# Altium PCB 8051_at89s52.PcbDoc
Units mil, origin at the board's own origin, x right, y up, seen from the top; angles counter-clockwise.
Board outline 4615.03 x 2945.03 mil, 2 copper layers (Top Layer, Bottom Layer); 43 components, 47 nets, 185 pads, 22 vias.
Unrouted connection lines stored in the file: 13.
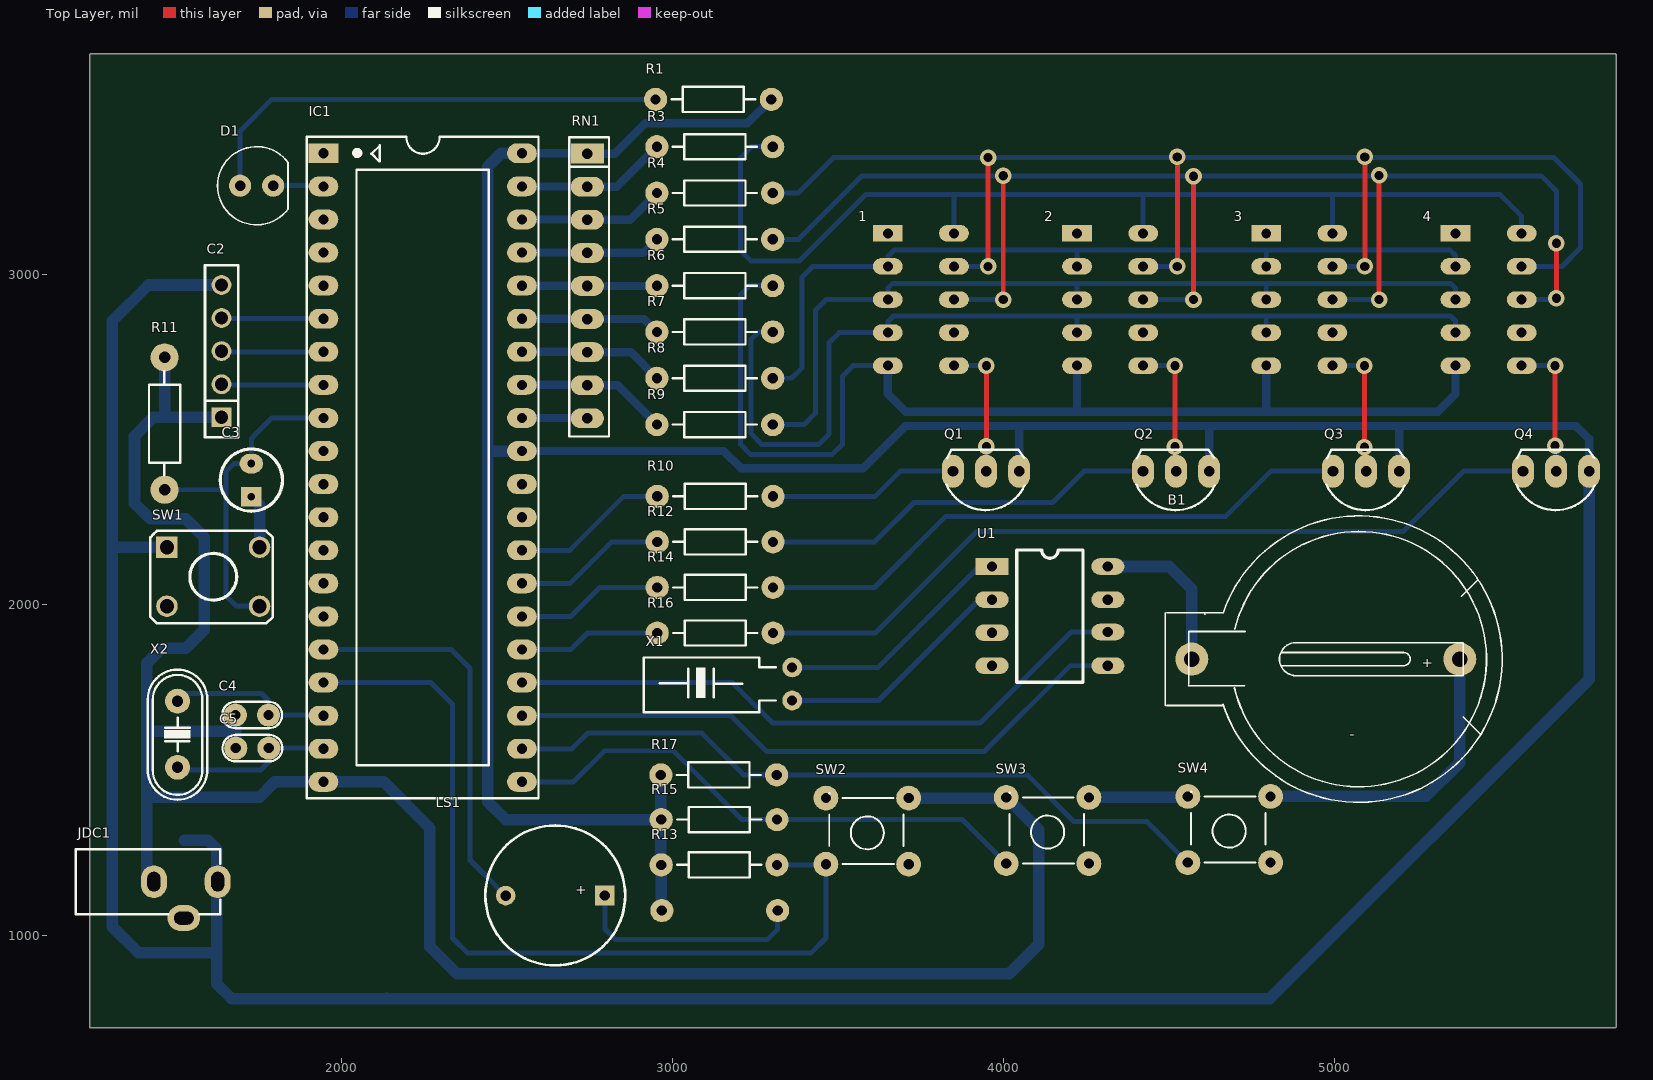
[diagram p0: Top Layer view]
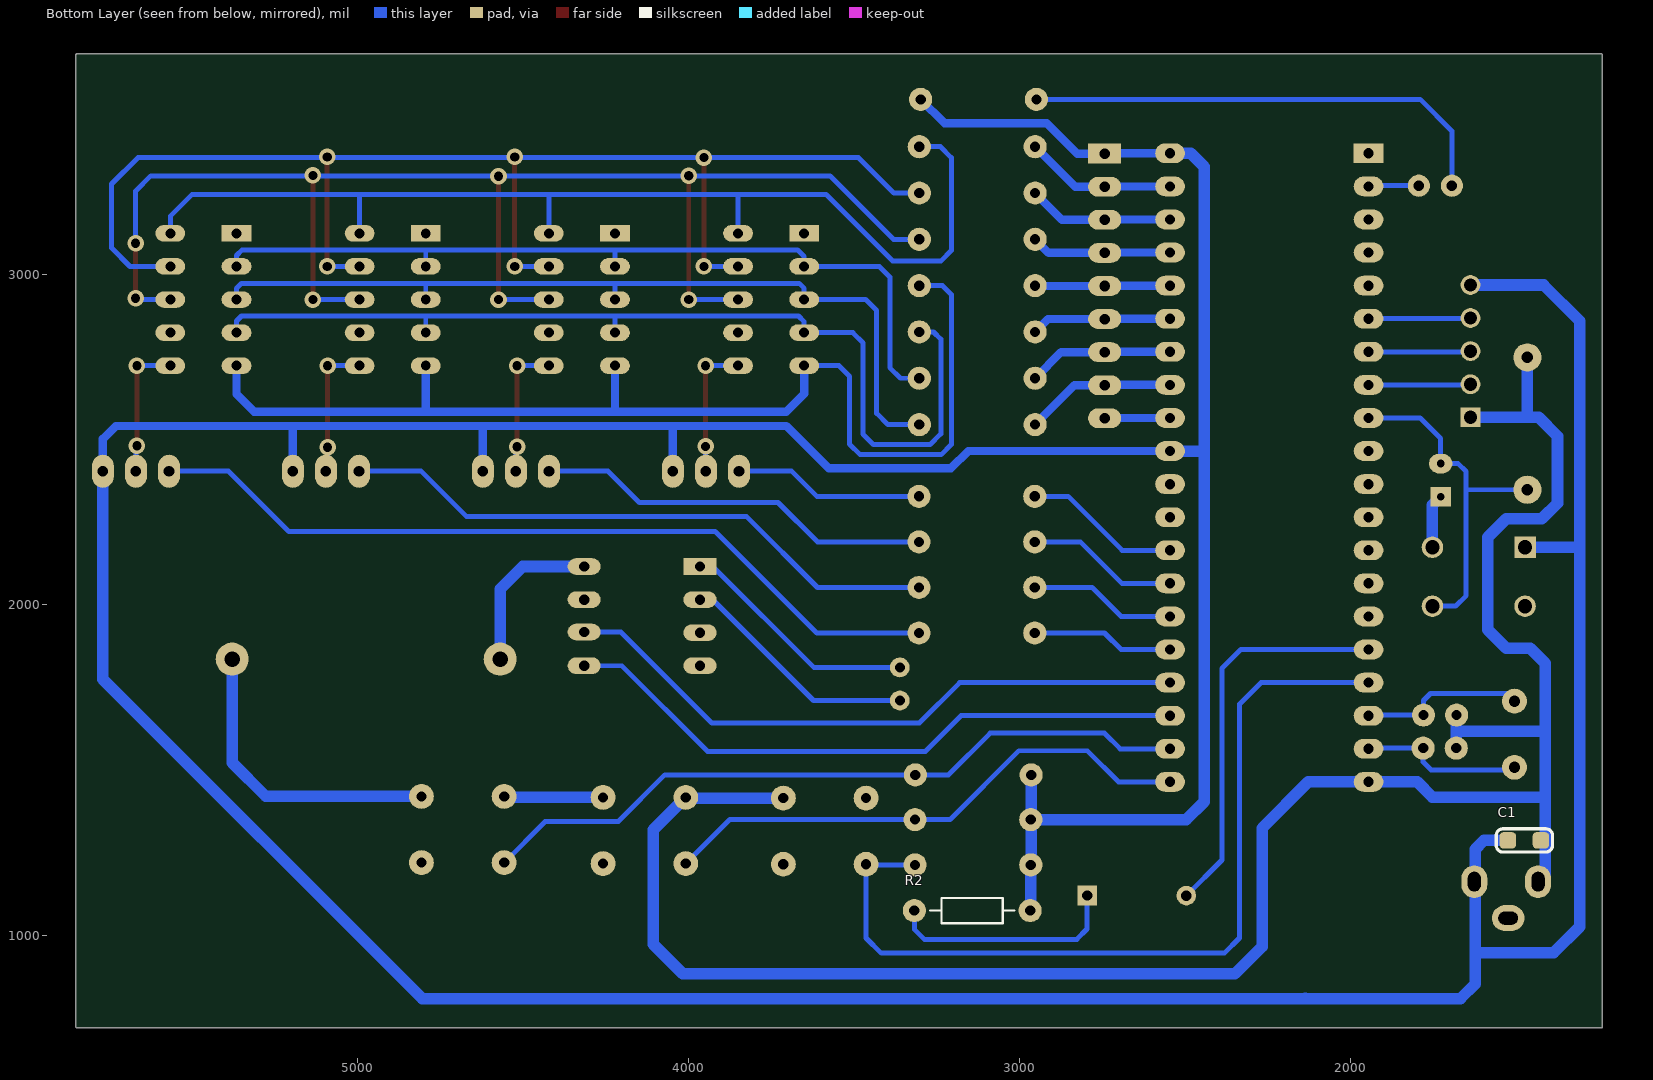
[diagram p1: Bottom Layer view, seen from below]
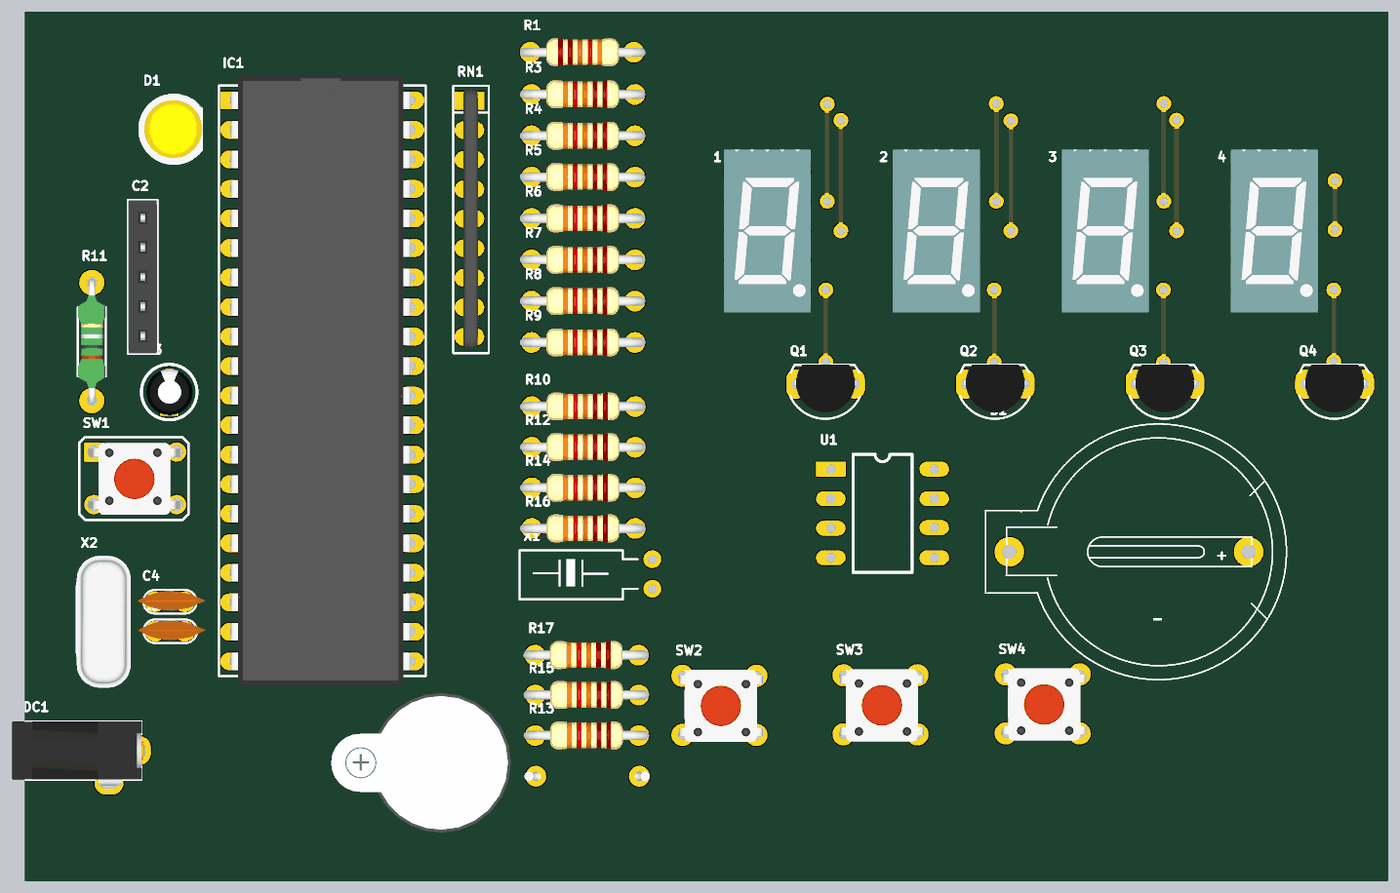
[diagram p2: 3D render of the assembled board from above, using the file's embedded part models]

## Layer stack, top to bottom
Top Solder: solder mask 0.4, Solder Resist, Dk 3.5
Top Layer: signal copper 1.4
Dielectric 1: dielectric 12.6, FR-4, Dk 4.8
Bottom Layer: signal copper 1.4
Bottom Solder: solder mask 0.4, Solder Resist, Dk 3.5

## Board outline
1236.98,726 ccw(c1242,726) 1242,720.99 5847,720.99 ccw(c5847,726) 5852.02,726 5852.02,3661 ccw(c5847,3661) 5847,3666.01 1242,3666.01 ccw(c1242,3661) 1236.98,3661

## Design rules (kind name [scope] priority, off if disabled: settings)
Clearance [All] p1: gap=10 ignorepadtopadclearanceinfootprint=FALSE except(0: Arc-Hole Track-Hole SMDPad-Hole THPad-Hole Via-Hole Fill-Hole Poly-Hole Region-Hole Text-Hole)
PolygonConnect [All] p1: connectstyle=Relief reliefconductorwidth=10 reliefentries=4 polygonreliefangle="90 Angle" airgapwidth=10
RoutingVias [All] p1: holewidth=28 width=50 viastyle="Through Hole" minholewidth=28 minwidth=50 maxholewidth=28 maxwidth=50
SolderMaskExpansion [All] p1: expansion=4
Width [All] p1: maxlimit=35 minlimit=15 preferedwidth=25
30 further rules are at their usual default settings.

## Components (designator, comment, footprint, x,y, rotation, side; value= is the part's Value field where it differs from the comment)
1 "7seg" SM410361N 3720,2883 r0 top
2 "7seg" SM410361N 4292,2883 r0 top
3 "7seg" SM410361N 4864,2883 r0 top
4 "7seg" SM410361N 5436,2883 r0 top
B1 "BATT-Holder" BATT-LI-Bott-22mm 4569,1836 r0 top value=3.3V
C1 "104" CAP_0805 1473,1288 r0 bottom
C2 "JP5" JP5-C1T 1636,2567 r90 top
C3 "10uF" CA-ALU-2.54 1726,2377 r90 top value=104
C4 "33pF" CN1 1678,1667 r0 top value=100pF
C5 "33pF" CN1 1679,1567 r0 top value=100pF
D1 "LED" "LED-0 5mm YELLOW" 1742,3267 r90 top
IC1 "AT89S52" DIP40/W0.6 1944,3365 r270 top
JDC1 "Jac DC" DC3 1624.36,1163.24 r0 top
LS1 "SPEAKER" speaker 2795,1121.5 r180 top
Q1 "A1015" QTO-92 3947,2404 r180 top
Q2 "A1015" QTO-92 4521.33,2404 r180 top
Q3 "A1015" QTO-92 5095.67,2404 r180 top
Q4 "A1015" QTO-92 5670,2404 r180 top
R1 "1k" R1/4W 3298,3528 r180 top value="R1/4W - 1K"
R2 "1k" R1/4W 2967,1076 r0 bottom value="R1/4W - 1K"
R3 "1k" R1/4W 2952,3385 r0 top value="R1/4W - 1K"
R4 "1k" R1/4W 2952,3245 r0 top value="R1/4W - 1K"
R5 "1k" R1/4W 2952,3105 r0 top value="R1/4W - 1K"
R6 "1k" R1/4W 2952,2965 r0 top value="R1/4W - 1K"
R7 "1k" R1/4W 2952,2825 r0 top value="R1/4W - 1K"
R8 "1k" R1/4W 2952,2685 r0 top value="R1/4W - 1K"
R9 "1k" R1/4W 2952,2545 r0 top value="R1/4W - 1K"
R10 "1k" R1/4W 2953,2328 r0 top value="R1/4W - 1K"
R11 "10k" RES-1/4W 1459,2533 r270 top value="R1/4W - 1K"
R12 "1k" R1/4W 2953,2190.33 r0 top value="R1/4W - 1K"
R13 "10k" R1/4W 2965,1214 r0 top value="R1/4W - 1K"
R14 "1k" R1/4W 2953,2052.67 r0 top value="R1/4W - 1K"
R15 "10k" R1/4W 2965,1351 r0 top value="R1/4W - 1K"
R16 "1k" R1/4W 2953,1915 r0 top value="R1/4W - 1K"
R17 "10k" R1/4W 2964,1486 r0 top value="R1/4W - 1K"
RN1 "10K" RN8 2742,3364 r270 top value="Tro thanh 10K"
SW1 "SW" "BUTTON 4 PIN" 1611,2085 r0 top value="Button chip 4 pin"
SW2 "SW" SW4 3713,1216 r180 top value="Button chip 4 pin"
SW3 "SW" SW4 4258,1218 r180 top value="Button chip 4 pin"
SW4 "SW" SW4 4807,1221 r180 top value="Button chip 4 pin"
U1 "Realtime Clock IC" DS1307.Dip8 3965,2116.03 r0 top
X1 "32,768 Khz" XT32k 3361,1711 r180 top value=32,768khz
X2 "12MHz" XT2 1503,1609 r90 top value=4Mhz

## Footprints (in the part's own frame and the unit in brackets; to place one, negate y for a bottom-side part, rotate by r counter-clockwise, add the part's x,y. Pads: shape width x height; smd on the part's side, far side on the other; paste and mask are expansions set on the pad)
BATT-LI-Bott-22mm [mil]
  round 100 hole 47.24 unplated: 1(0,0) 2(810,0)
  silkscreen extent -80,-433 938,433, body extent -81,-435 938,433, height 283
"BUTTON 4 PIN" [mil] "BUTTON SMORE 280mil x 178mil"
  rect 65x65 hole 43.31: 1(-140,89)
  round 65 hole 43.31: 1(140,89) 2(-140,-89) 2(140,-89)
  silkscreen extent -190,-141 180,139, body extent -159,-124 153,120, height 276
CA-ALU-2.54 [mm]
  rect 1.5x1.58 hole 0.6: 1(-1.27,0)
  oval 1.5x1.8 hole 0.6: 2(1.27,0)
  silkscreen extent -2.39,-2.39 2.39,2.39, body extent -2,-2.03 2.01,1.97, height 7.01
CAP_0805 [mil]
  rrect50% 50x50 smd: 1(-50,0) 2(50,0)
  silkscreen extent -85,-35 85,35, body extent -40,-25 40,25, height 24
CN1 [mil]
  round 70 hole 31: 1(0,0) 2(100,0)
  silkscreen extent -40,-40 141,40, body extent -60,-30 170,37, height 265
DC3 [mm] "WR-DC_DC Power Jack_Right Angled_THT Center Pin ?1.0_Plug ID ?1.05_Plug OD ?3.5"
  oval 2x2.5 hole 1 slot 1.5 at 90 deg: 1(0,0) 2(-4.9,0)
  oval 2.5x2 hole 1 slot 1.5 at 0 deg: 3(-2.6,-2.8)
  silkscreen extent -10.9,-2.5 0.2,2.5, body extent -10.9,-3 0.4,2.5, height 7.81
DIP40/W0.6 [mil] "40 PIN, W 600mil, Pin to pin 100mil"
  rect 60x90 hole 31: 1(0,0)
  oval 60x90 hole 31: 2(100,0) 3(200,0) 4(300,0) 5(400,0) 6(500,0) 7(600,0) 8(700,0) 9(800,0) 10(900,0) 11(1000,0) 12(1100,0) 13(1200,0) 14(1300,0) 15(1400,0) 16(1500,0) 17(1600,0) 18(1700,0) 19(1800,0) 20(1900,0) 21(1900,600) 22(1800,600) 23(1700,600) 24(1600,600) 25(1500,600) 26(1400,600) 27(1300,600) 28(1200,600) 29(1100,600) 30(1000,600) 31(900,600) 32(800,600) 33(700,600) 34(600,600) 35(500,600) 36(400,600) 37(300,600) 38(200,600) 39(100,600) 40(0,600)
  silkscreen extent -50,-50 1950,650, body extent -82,-10 1982,600, height 224
DS1307.Dip8 [mm] "Dual Inline Package 8 pins"
  rect 2.54x1.27 hole 0.8: 1(0,0)
  oval 2.54x1.27 hole 0.8: 2(0,-2.54) 3(0,-5.08) 4(0,-7.62) 5(8.89,-7.62) 6(8.89,-5.03) 7(8.89,-2.54) 8(8.89,0)
  silkscreen extent 1.91,-8.89 6.98,1.27, body extent 0.03,-8.89 8.77,1.27, height 5.4
JP5-C1T [mm] "5 row, straight, gold plating"
  rect 1.52x1.52 hole 1.02: 1(0,0)
  round 1.52 hole 1.02: 2(2.54,0) 3(5.08,0) 4(7.62,0) 5(10.16,0)
  silkscreen extent -1.52,-1.27 11.68,1.27, body extent -1.52,-1.25 11.68,1.25, height 8.51
"LED-0 5mm YELLOW" [mil] "Typical LED; YELLOW; 2 Leads; Solder Pad 35mil"
  round 67 hole 32: 1(0,50) 2(0,-50)
  silkscreen extent -118,-96 118,118, body extent -118,-96 119,117, height 345
QTO-92 [mil] "TO-92"
  oval 66x100 hole 32: 1(-100,0) 2(0,0) 3(100,0)
  silkscreen extent -117,-65 120,118, body extent -109,-66 109,96, height 245
R1/4W [mil] "R 1/4W, 2 Pin, 350mil"
  round 70 hole 31: 1(0,0) 2(350,0)
  silkscreen extent 48,-38 302,38, body extent -40,-47 386,47, height 111
RES-1/4W [mil]
  round 85 hole 35: 1(-215,5) 2(185,5)
  silkscreen extent -173,-42 141,52, body extent -227,-42 197,52, height 95
RN8 [mil] "R SIP8, 9 Pin"
  rect 60x100 hole 32: 1(0,0)
  oval 60x100 hole 32: 2(100,0) 3(200,0) 4(300,0) 5(400,0) 6(500,0) 7(600,0) 8(700,0) 9(800,0)
  silkscreen extent -50,-55 855,65, body extent -43,-20 843,29, height 219
SM410361N [mil] "7seg-0,36''"
  rect 90x50 hole 30: 1(-70,240)
  oval 90x50 hole 30: 2(-70,140) 3(-70,40) 4(-70,-60) 5(-70,-160) 6(130,-160) 7(130,-60) 8(130,40) 9(130,140) 10(130,240)
  body extent -118,-236 178,316, height 336
speaker [mm]
  rect 1.5x1.5 hole 0.8: 1(0,0)
  round 1.5 hole 0.8: 2(7.62,0.013)
  silkscreen extent -1.55,-5.38 9.18,5.36, body extent -2.22,-6 13.24,6, height 4.5
SW4 [mil] "SW button 4pin, 250 x250 mil"
  round 75 hole 31: 1(0,0) 2(250,-200) 3(250,0) 4(0,-200)
  silkscreen extent 15,-215 240,0, body extent -36,-220 276,24, height 276
XT2 [mil] "Footpin for Crystal 2 pin"
  round 75 hole 34: 1(-100,0) 2(100,0)
  silkscreen extent -198,-90 195,90, body extent -233,-93 213,90, height 138
XT32k [mil] "Crystal 32k, 2 pin, real timer for DS1307"
  round 60 hole 30: 1(0,0) 2(0,-100)
  silkscreen extent 50,-130 449,36

## Part data
1 2 3 4: library part SM410361N, "7seg 0,36''"
B1: "Battery holder", Manufacturer=China, ComponentLink1Description="Digikey Part Link", ComponentLink2Description="Open Datasheet", ComponentLink2URL=H:\LIBRARY\LIBRARY.Datasheet\, Price="3000 VND", Published=13-April-2009, Publisher="Hoang Nguyen", Vendor=Digikey
C1: library part "Cap Semi", "Capacitor (Semiconductor SIM Model)", LatestRevisionDate=17-Jul-2002, LatestRevisionNote="Re-released for DXP Platform.", PackageReference=C1206, Publisher="Altium Limited"
C2: "WR-PHD 2.54 mm Angled Socket Header", Manufacturer="Würth Elektronik eiSos GmbH", partNo=613005143121, ComponentLink1 Description=Manufacturer, ComponentLink1URL=http://www.we-online.com, ComponentLink2 Description=Datasheet, ComponentLink2URL=http://katalog.we-online.de/em/datasheet/6130xx143121.pdf, Created by="Karrer Zheng", Created Date="29 March 2013", NoPins=05
C3: library part CN-ALU-DIP, "Capacitor (Semiconductor SIM Model)", LatestRevisionDate=17-Jul-2002, LatestRevisionNote="Re-released for DXP Platform.", PackageReference=C1206, Publisher="Altium Limited"
C4 C5: library part CN1, "Cap np  1pF - 472pF"
D1: "Typical LED", LatestRevisionDate=08-Jul-2005, LatestRevisionNote="Mech Layer 1 removed.", PackageReference=LED-1, Published=8-Jun-2000, Publisher="Altium Limited"
IC1: "AT89S52, 8k Byte Flash Memory , 40 Pin"
JDC1: library part DCIN, "Jac DC input"
Q1 Q2 Q3 Q4: library part A1015_1, "PNP 600mW, ECB", =A1013
R1 R2 R3 R4 R5 R6 R7 R8 R9 R10 R11 R12 R13 R14 R15 R16 R17: library part R1/4W, "Resistor 1/4W"
RN1: library part RN8, "Resistor 8 (Thanh)"
SW1 SW2 SW3 SW4: library part SW4, "Switch button 4 pin"
U1: library part DS1307, Manufacturer=Maxim, ComponentLink1Description="Digikey Part Link", ComponentLink2Description="Open Datasheet", ComponentLink2URL=H:\LIBRARY\LIBRARY.Datasheet\DS1307.pdf
X1: library part XT32k, "Crystal 32,768kHz for timer real"
X2: library part XT2, "Crystal For all Crystal 2pin."
LS1: ComponentLink1Description="Digikey Part Link", ComponentLink2Description="Open Datasheet", ComponentLink2URL=H:\LIBRARY\LIBRARY.Datasheet\, Published=13-April-2009, Publisher="Hoang Nguyen", Vendor=Digikey

## Via types
v1: diameter 50, hole 28, Top Layer to Bottom Layer, 22 vias

## Nets (pads, with @x,y where several pads share a name; then routed paths per layer and width w, separated by ;. In a path a pad name is that pad's centre, name@x,y a point inside that pad or via, vN(x,y) a via of type N, cw(c..) or ccw(c..) an arc to the next point about the centre after c; other vN are vias at no path point)
+5V: C1.2 C2.5 C3.1 IC1.31 IC1.40 JDC1.1 Q1.1 Q2.1 Q3.1 Q4.1 R1.1 R2.1 R13.1 R15.1 R17.1 RN1.1 SW1.1 | length 16347.2
  Bottom Layer w25: IC1.31 3154,2465 3206,2413 3576,2413 3704,2541 4047,2541 ; IC1.40 2741,3365 RN1.1 2825,3364 2917,3456 3226,3456 R1.1 ; Q1.1 4047,2541 ; Q2.1 4621.33,2537.33 4625,2541 ; Q3.1 5195.67,2540.67 5196,2541 ; Q4.1 5770,2502 5731,2541 5196,2541 ; 4047,2541 4625,2541 ; 4625,2541 5196,2541
  Bottom Layer w35: SW1.1@1471,2174 1306,2174 ; C1.2 1595,1288 1622,1261 1622,949 ; C2.5 1415,2967 1306,2858 1306,2174 ; C3.1 1751,2302 SW1.1@1751,2174 ; 2135.91,810.91 2135,810 ; IC1.31 2445,2465 2441,2469 ; IC1.40 2482,3365 2441,3324 2441,2469 ; R17.1 R15.1@2964,1351 ; R15.1 R15.1@2964,1351 ; R2.1 2965,1078 R13.1 2964,1215 R15.1@2964,1351 ; Q4.1 5770,1775 4805,810 2135,810 ; 1306,2174 1306,1027 1384,949 1622,949 ; 1622,949 1622,854 1666,810 2135,810 ; 2441,2469 2441,1405 2495,1351 R15.1@2964,1351
a: 1.10 2.10 3.10 4.10 R3.2 | length 3283.3
  Bottom Layer w15: R3.2 3238,3385 3205,3352 3205,3071 3236,3040 3383,3040 3584,3241 3851,3241 ; 1.10 3850,3240 3851,3241 ; 2.10 4422,3240 4421,3241 ; 3.10 4994,3240 4995,3241 ; 4.10 5566,3175 5500,3241 4995,3241 ; 3851,3241 4421,3241 ; 4421,3241 4995,3241
b: 1.9 2.9 3.9 4.9 R4.2 | length 4209.1
  Top Layer w15: v1(3953,3023) v1(3953,3352) ; v1(4525,3023) v1(4525,3354) ; v1(5092,3023) v1(5092,3354)
  Bottom Layer w15: R4.2 3379,3245 3486,3352 v1(3953,3352) v1@5092,3352 ; 1.9 v1(3953,3023) ; 2.9 v1(4525,3023) ; 3.9 v1(5092,3023) ; v1(5092,3354) v1@5093,3355 ; v1@5093,3352 5664,3352 5744,3272 5744,3079 5688,3023 4.9
BTN1: IC1.17 R13.2 SW2.1 SW2.3 | length 2662.9
  Bottom Layer w15: IC1.17 2269,1765 2334,1700 2334,993 2380,947 3417,947 3463,993 SW2.3 3461,1214 R13.2
BTN2: IC1.21 R15.2 SW3.1 SW3.3 | length 1644.2
  Bottom Layer w15: IC1.21 2700,1465 2794,1559 3001,1559 3209,1351 R15.2 3875,1351 SW3.3
BTN3: IC1.22 R17.2 SW4.1 SW4.3 | length 2194.4
  Bottom Layer w15: IC1.22 2695,1565 2742,1612 3088,1612 3214,1486 R17.2 4071,1486 4212,1345 4433,1345 SW4.3
buz: IC1.16 LS1.2 | length 1198.3
  Bottom Layer w15: IC1.16 2330,1865 2387,1808 2387,1229 LS1.2
c: 1.8 2.8 3.8 4.8 R5.2 | length 4464.9
  Top Layer w15: v1(3999,2923) v1(3999,3297) ; v1(4574,2923) v1(4574,3296) ; v1(5135,2923) v1(5135,3298) ; v1(5671,2927) v1(5671,3093)
  Bottom Layer w15: R5.2 3380,3105 3572,3297 v1(3999,3297) v1@4575,3297 ; 1.8 v1(3999,2923) ; 2.8 v1(4574,2923) ; v1(4574,3296) v1@4575,3297 ; 3.8 v1(5135,2923) ; v1@5135,3297 v1@4575,3297 ; v1(5135,3298) v1@5138,3301 ; v1@5138,3297 5625,3297 5671,3251 v1(5671,3093) ; 4.8 5667,2923 v1(5671,2927)
d: 1.5 2.5 3.5 4.5 R6.2 | length 3460.7
  Bottom Layer w15: R6.2 3232,2965 3205,2938 3205,2485 3236,2454 3481,2454 3513,2486 3513,2691 3545,2723 1.5
  Bottom Layer w25: 1.5 3650,2638 3704,2584 4224,2584 ; 2.5 4222,2586 4224,2584 ; 3.5 4794,2584 ; 4.5 5366,2637 5313,2584 4794,2584 ; 4224,2584 4794,2584
e: 1.4 2.4 3.4 4.4 R7.2 | length 2987.4
  Bottom Layer w15: R7.2 3259,2825 3237,2803 3237,2517 3269,2485 3441,2485 3472,2516 3472,2792 3503,2823 1.4 3650,2856 3667,2873 4218,2873 ; 2.4 4222,2869 4218,2873 ; 3.4 4794,2872 4795,2873 ; 4.4 5366,2858 5351,2873 4795,2873 ; 4218,2873 4795,2873
f: 1.2 2.2 3.2 4.2 R8.2 | length 2544.5
  Bottom Layer w15: R8.2 3359,2685 3391,2717 3391,2991 3423,3023 1.2 3650,3053 3670,3073 4221,3073 ; 2.2 4222,3072 4221,3073 ; 3.2 4794,3070 4791,3073 ; 4.2 5366,3056 5349,3073 4791,3073 ; 4221,3073 4791,3073
g: 1.3 2.3 3.3 4.3 R9.2 | length 2582.4
  Bottom Layer w15: R9.2 3397,2545 3431,2579 3431,2890 3464,2923 1.3 3650,2957 3665,2972 4220,2972 ; 2.3 4222,2970 4220,2972 ; 3.3 4794,2971 4795,2972 ; 4.3 5366,2957 5351,2972 4795,2972 ; 4220,2972 4795,2972
GND: B1.2 C1.1 C2.1 C4.1 C5.1 IC1.20 JDC1.2 JDC1.3 R11.1 SW2.2 SW2.4 SW3.2 SW3.4 SW4.2 SW4.4 | length 7668.6
  Bottom Layer w35: JDC1.2@1421.09,1161 1410,1172.09 1410,1419 ; R11.1 1464,2574 1471,2567 ; C2.1 1471,2567 ; 1678,1618 1412,1618 1410,1620 ; C4.1 1679,1666 C5.1 ; SW2.4 4006,1416 SW3.2 4106,1320 4106,974 4017,885 2348,885 2266,967 2266,1325 2126,1465 IC1.20 1797,1465 1751,1419 1410,1419 ; SW3.4 4554,1418 SW4.2 ; SW4.4 5277,1421 5379,1523 B1.2 ; 1410,1419 1410,1620 ; 1410,1620 1410,1824 1455,1869 1528,1869 1584,1925 1584,2204 1528,2260 1420,2260 1373,2307 1373,2510 1430,2567 1471,2567
LED: D1.2 IC1.2 | length 152.8
  Bottom Layer w15: D1.2 1942,3267 IC1.2
LED1: 1.1 1.6 Q1.2 | length 417.4
  Top Layer w15: v1(3948,2479) v1(3948,2723)
  Bottom Layer w15: 1.6 v1(3948,2723) ; Q1.2 3948,2405 v1(3948,2479)
LED1_MCU: IC1.28 R10.1 | length 476.5
  Bottom Layer w15: IC1.28 2689,2165 2852,2328 R10.1
LED2: 2.1 2.6 Q2.2 | length 416.4
  Top Layer w15: v1(4518,2478.33) v1(4518,2723)
  Bottom Layer w15: 2.6 v1(4518,2723) ; v1(4518,2478.33) 4521.33,2475 Q2.2
LED2_MCU: IC1.27 R12.1 | length 460.9
  Bottom Layer w15: IC1.27 2690,2065 2815.33,2190.33 R12.1
LED3: 3.1 3.6 Q3.2 | length 417.7
  Top Layer w15: v1(5090.67,2476.67) v1(5090.67,2723)
  Bottom Layer w15: 3.6 v1(5090.67,2723) ; v1(5090.67,2476.67) 5090.67,2409 Q3.2
LED3_MCU: IC1.26 R14.1 | length 445.3
  Bottom Layer w15: IC1.26 2692,1965 2779.67,2052.67 R14.1
LED4: 4.1 4.6 Q4.2 | length 421.2
  Top Layer w15: v1(5667,2481) v1(5667,2723)
  Bottom Layer w15: 4.6 v1(5667,2723) ; v1(5667,2481) 5670,2478 Q4.2
LED4_MCU: IC1.25 R16.1 | length 429.7
  Bottom Layer w15: IC1.25 2692,1865 2742,1915 R16.1
MISO: C2.3 IC1.7 | length 308.8
  Bottom Layer w15: C2.3 1638,2765 IC1.7
MOSI: C2.4 IC1.6 | length 308.8
  Bottom Layer w15: C2.4 1638,2865 IC1.6
NetB1_1: B1.1 U1.8 | length 494.2
  Bottom Layer w35: U1.8 4500.97,2116.03 4569,2048 B1.1
NetC3_2: C3.2 IC1.9 R11.2 SW1.2 | length 1081.9
  Bottom Layer w15: R11.2 1649,2348 ; SW1.2@1751,1996 1681,1996 1649,2028 1649,2348 ; IC1.9 1788,2565 1726,2503 C3.2 1673,2427 1649,2403 1649,2348
NetC4_2: C4.2 IC1.18 X2.2 | length 504.1
  Bottom Layer w15: X2.2 1526,1732 1757,1732 1778,1711 C4.2 1942,1667 IC1.18
NetC5_2: C5.2 IC1.19 X2.1 | length 497.1
  Bottom Layer w15: X2.1 1511,1501 1755,1501 1779,1525 C5.2 1942,1567 IC1.19
NetD1_1: D1.1 R1.2 | length 1460.8
  Bottom Layer w15: D1.1 1692,3432 1788,3528 R1.2
NetIC1_32: IC1.32 RN1.9 | length 198.4
  Bottom Layer w25: IC1.32 2741,2565 RN1.9
NetIC1_33: IC1.33 R9.1 RN1.8 | length 457.7
  Bottom Layer w25: IC1.33 2741,2665 RN1.8 2833,2664 R9.1
NetIC1_34: IC1.34 R8.1 RN1.7 | length 441.1
  Bottom Layer w25: IC1.34 2741,2765 RN1.7 2873,2764 R8.1
NetIC1_35: IC1.35 R7.1 RN1.6 | length 424.6
  Bottom Layer w25: IC1.35 2741,2865 RN1.6 2913,2864 R7.1
NetIC1_36: IC1.36 R6.1 RN1.5 | length 408.8
  Bottom Layer w25: IC1.36 2741,2965 RN1.5 2951,2964 R6.1
NetIC1_37: IC1.37 R5.1 RN1.4 | length 425.4
  Bottom Layer w25: IC1.37 2741,3065 RN1.4 2911,3064 R5.1
NetIC1_38: IC1.38 R4.1 RN1.3 | length 442
  Bottom Layer w25: IC1.38 2741,3165 RN1.3 2871,3164 R4.1
NetIC1_39: IC1.39 R3.1 RN1.2 | length 458.5
  Bottom Layer w25: IC1.39 2741,3265 RN1.2 2831,3264 R3.1
NetLS1_1: LS1.1 R2.2 | length 705.8
  Bottom Layer w15: LS1.1 2795,1020 2826,989 3287,989 3317,1019 R2.2
NetQ1_3: Q1.3 R10.2 | length 575.5
  Bottom Layer w15: R10.2 3612,2328 3688,2404 Q1.3
NetQ2_3: Q2.3 R12.2 | length 1206.8
  Bottom Layer w15: R12.2 3610,2190.33 3729.17,2309.5 4148.5,2309.5 4243,2404 Q2.3
NetQ3_3: Q3.3 R14.2 | length 1838.2
  Bottom Layer w15: R14.2 3610,2052.67 3823.83,2266.5 4670.5,2266.5 4808,2404 Q3.3
NetQ4_3: Q4.3 R16.2 | length 2469.6
  Bottom Layer w15: R16.2 3612,1915 3919,2222 5208,2222 5390,2404 Q4.3
NetU1_1: U1.1 X1.2 | length 730.3
  Bottom Layer w15: X1.2 3621,1811 3926.03,2116.03 U1.1
NetU1_2: U1.2 X1.1 | length 730.3
  Bottom Layer w15: X1.1 3622,1711 3927.03,2016.03 U1.2
SCK: C2.2 IC1.8 | length 308.8
  Bottom Layer w15: C2.2 1638,2665 IC1.8
SCL: IC1.24 U1.6 | length 1935.4
  Bottom Layer w15: IC1.24 3180,1765 3302,1643 3929,1643 4204,1918 U1.6
SDA: IC1.23 U1.5 | length 1923
  Bottom Layer w15: IC1.23 3176,1665 3284,1557 3941.97,1557 4201,1816.03 U1.5
pads on no net: 1.7 2.7 3.7 4.7 IC1.1 IC1.3 IC1.4 IC1.5 IC1.10 IC1.11 IC1.12 IC1.13 IC1.14 IC1.15 IC1.29 IC1.30 U1.3 U1.4 U1.7

## Silkscreen, mask and mechanical layers (free items; w line width, h text height)
Drill Drawing:
  lines w10: 1294,3661 5847,3661 5847,726 1242,726 1242,3661 1309,3661

## Text inside footprints (layer, text, board x,y; h text height)
B1: Top Overlay "+" at 5264,1811 h30; Top Overlay "-" at 5046.64,1595.6 h30
LS1: Top Overlay "+" at 2739.5,1149.5 h30 r180